# Altium PCB PCB1.PcbDoc
Units mm, origin at the board's own origin, x right, y up, seen from the top; angles counter-clockwise.
Board outline 101.09 x 92.71 mm, 2 copper layers (Top Layer, Bottom Layer); 37 components, 73 nets, 273 pads, 57 vias.
Unrouted connection lines stored in the file: 30.
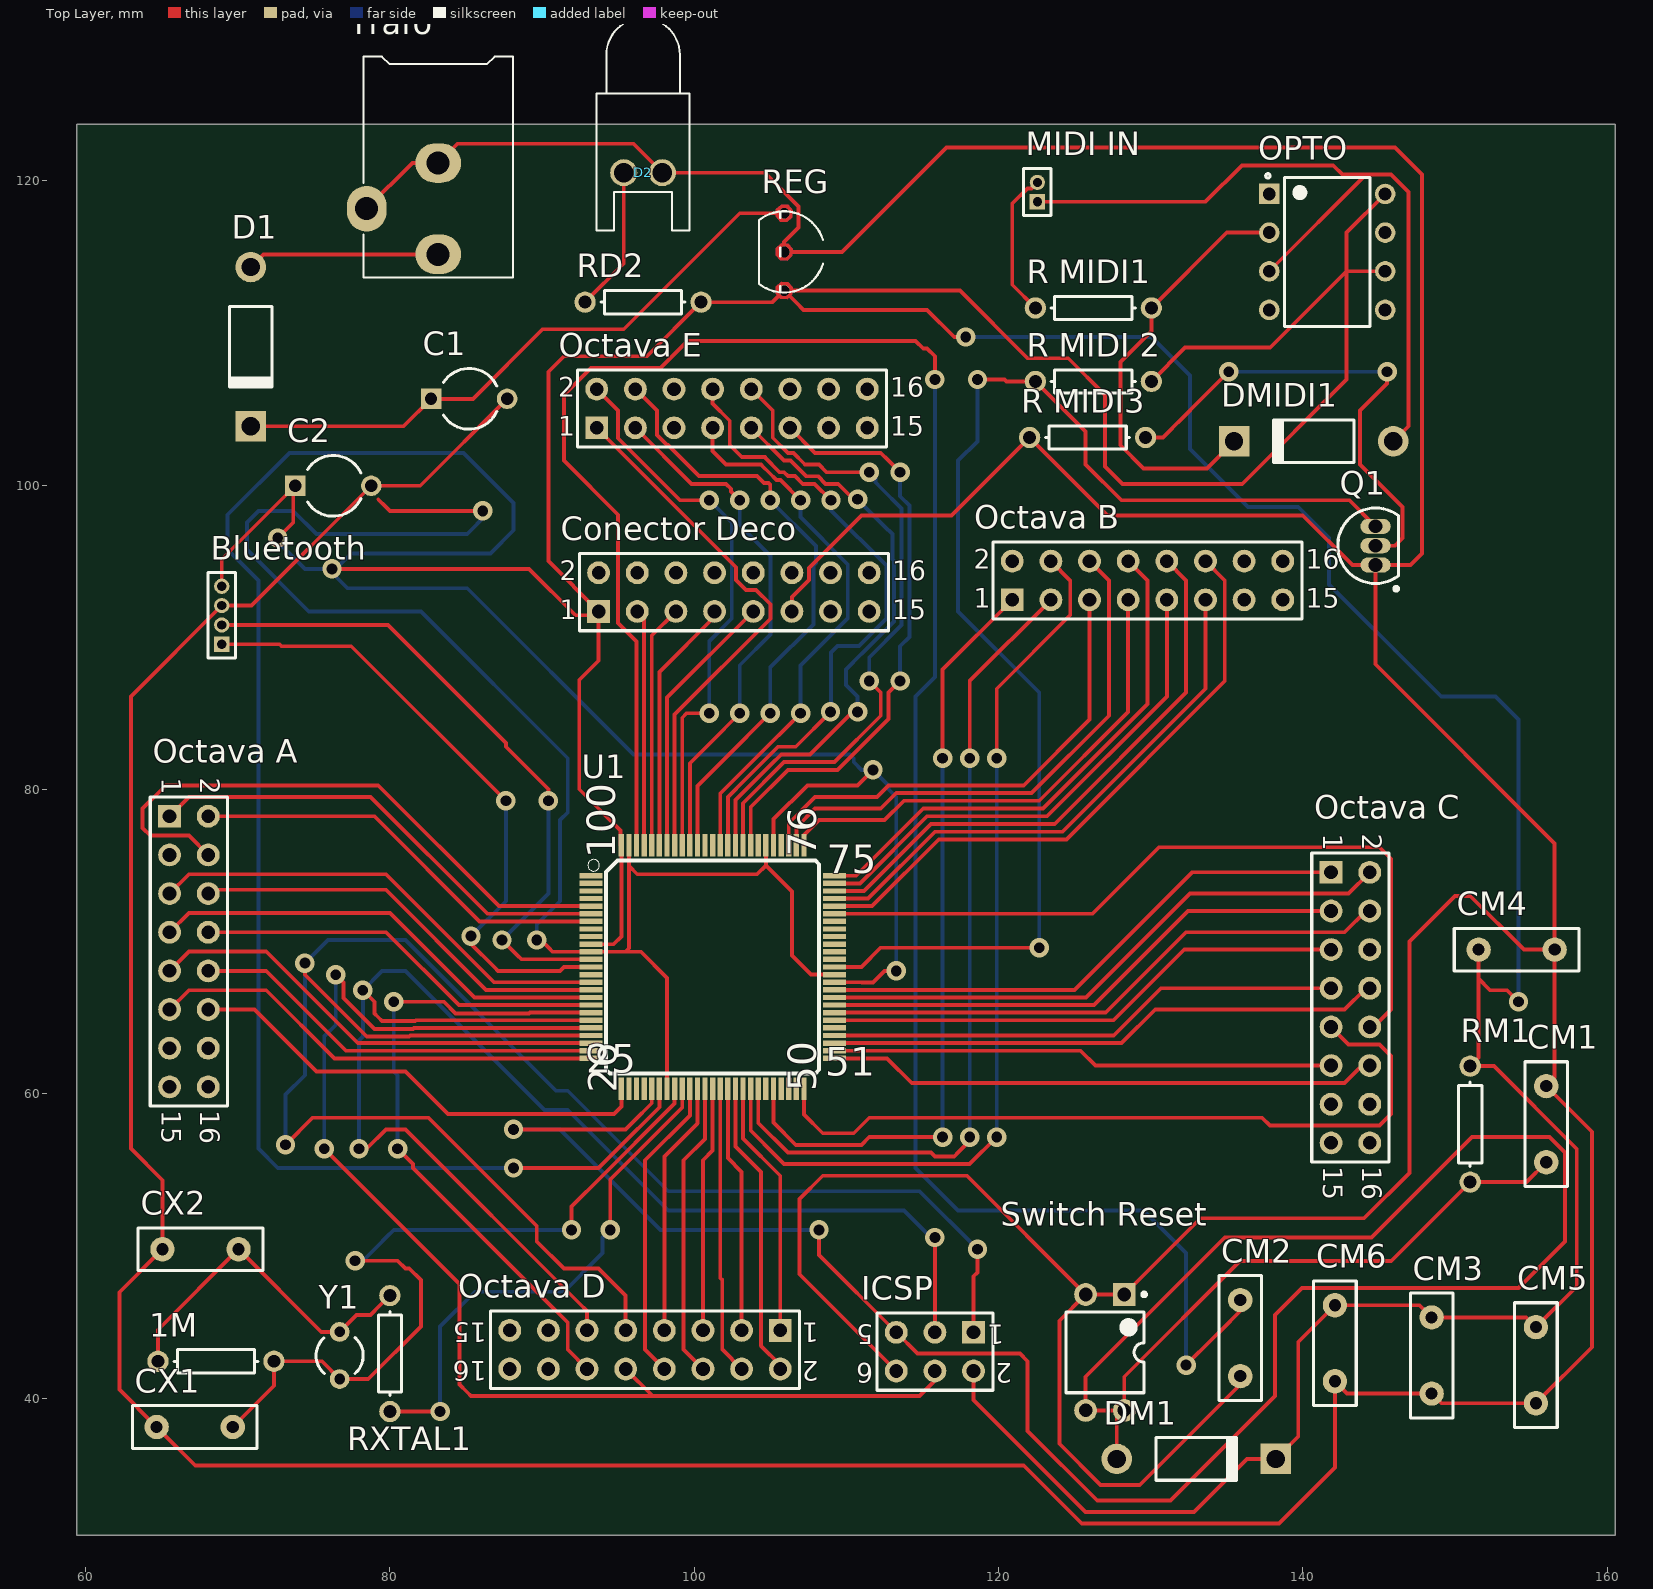
[diagram p0: Top Layer view]
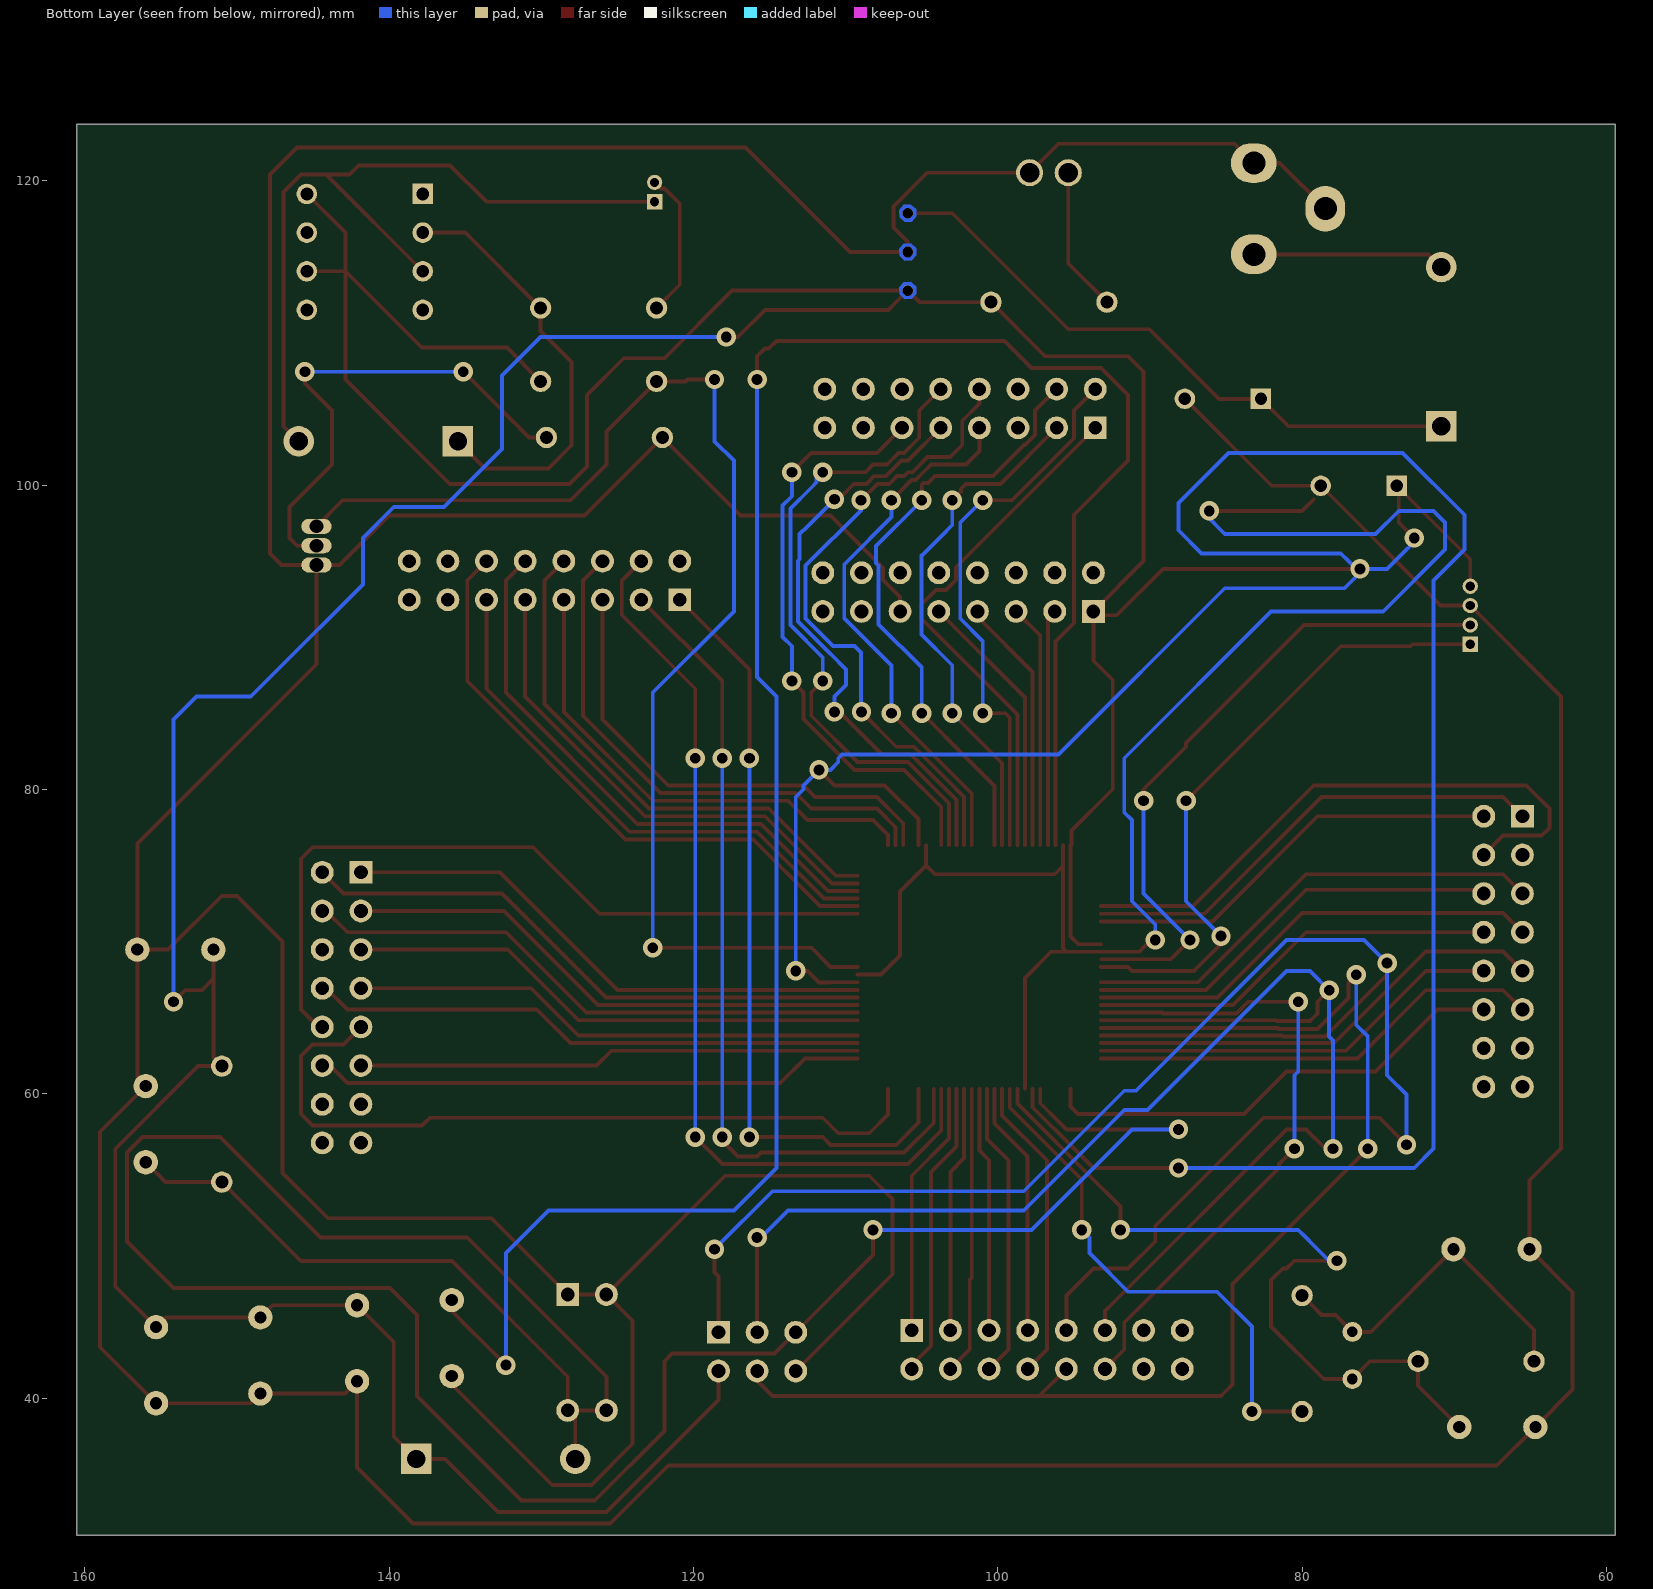
[diagram p1: Bottom Layer view, seen from below]

## Layer stack, top to bottom
Top Solder: solder mask 0.0102, Solder Resist, Dk 3.5
Top Layer: signal copper 0.0356
Dielectric 1: dielectric 0.32, FR-4, Dk 4.8
Bottom Layer: signal copper 0.0356
Bottom Solder: solder mask 0.0102, Solder Resist, Dk 3.5

## Board outline
59.436,30.988 160.528,30.988 160.528,123.698 59.436,123.698

## Design rules (kind name [scope] priority, off if disabled: settings)
Clearance [All] p1: gap=0.1
PolygonConnect [All] p1: connectstyle=Relief reliefconductorwidth=0.254 reliefentries=4 polygonreliefangle="90 Angle" airgapwidth=0.254
RoutingVias [All] p1: holewidth=0.711 width=1.27 viastyle="Through Hole" minholewidth=0.711 minwidth=1.27 maxholewidth=0.711 maxwidth=1.27
SMDNeckDown [All] p1 off: percent=0.000
ShortCircuit [OnLayer('Bottom Layer') vs OnLayer('Top Layer')] p1: allowed=FALSE
SolderMaskExpansion [All] p1: expansion=0.102
Width [All] p1: maxlimit=0.254 minlimit=0.254 preferedwidth=0.254
29 further rules are at their usual default settings.

## Components (designator, comment, footprint, x,y, rotation, side; value= is the part's Value field where it differs from the comment)
1M "Res1" AXIAL-0.3 68.58,42.418 r0 top (schematic designator RXTAL)
Bluetooth "HC-06" MHDR1X4 68.961,89.535 r90 top
C1 "Cap2" CAPR5-4X5 85.217,105.664 r0 top
C2 "Cap2" CAPR5-4X5 76.287,99.949 r0 top
CM1 "" "C Disc 8x2.5-5.0" 156,58 r90 top
CM2 "" "C Disc 8x2.5-5.0" 135.89,43.942 r90 top
CM3 "" "C Disc 8x2.5-5.0" 148.463,42.799 r90 top
CM4 "" "C Disc 8x2.5-5.0" 154.051,69.469 r180 top
CM5 "" "C Disc 8x2.5-5.0" 155.321,42.164 r90 top
CM6 "" "C Disc 8x2.5-5.0" 142.113,43.601 r270 top
"Conector Deco" "Header 8X2" HDR2X8 93.726,91.694 r0 top
CX1 "" "C Disc 8x2.5-5.0" 67.183,38.1 r0 top
CX2 "" "C Disc 8x2.5-5.0" 67.564,49.784 r0 top
D1 "Diode 1N4001" DO-41 70.866,109.093 r270 top
D2 "LED_ON" LED-0 96.647,120.523 r180 top
DM1 "Diode 1N4001" DO-41 133,36 r0 top
DMIDI1 "Diode 1N4148" DO-41 140.716,102.87 r180 top
ICSP "Header 3X2" HDR2X3 118.364,44.323 r180 top
"MIDI IN" "MHDR1X2" MHDR1X2 122.555,118.618 r90 top
"Octava A" "Header 8X2" HDR2X8 65.532,78.232 r270 top
"Octava B" "Header 8X2" HDR2X8 120.904,92.456 r0 top
"Octava C" "Header 8X2" HDR2X8 141.859,74.549 r270 top
"Octava D" "Header 8X2" HDR2X8 105.664,44.45 r180 top
"Octava E" "Header 8X2" HDR2X8 93.599,103.759 r0 top
OPTO "6N136" DIP762W50P254L977H451Q8 141.605,115.316 r0 top
Q1 "BC547" TO-92A 144.78,96.012 r0 top
"R MIDI1" "Res1" AXIAL-0.3 126.238,111.633 r180 top
"R MIDI3" "Res1" AXIAL-0.3 125.857,103.124 r180 top
"R MIDI 2" "Res1" AXIAL-0.3 126.238,106.807 r180 top
RD2 "Res1" AXIAL-0.3 96.647,112.014 r0 top
REG "7805" TO92- 105.918,115.316 r270 top
RM1 "Res1" AXIAL-0.3 151,58 r90 top
RXTAL1 "Res1" AXIAL-0.3 80.01,42.926 r90 top (schematic designator RXTAL)
"Switch Reset" "SW DIP-2" DIP-4 127,43 r270 top
Trafo "*" CONN_PWR_JACK_2.1x5.5mm 83.185,128.858 r0 top
U1 "MCU-ATMEGA2560-16AU(TQFP100)" TQFP100-0.5-14X14MM 101.219,68.326 r0 top
Y1 "XTAL" R38 76.708,42.799 r0 top

## Footprints (in the part's own frame and the unit in brackets; to place one, negate y for a bottom-side part, rotate by r counter-clockwise, add the part's x,y. Pads: shape width x height; smd on the part's side, far side on the other; paste and mask are expansions set on the pad)
AXIAL-0.3 [mm] "Axial Device, Thru-Hole; 2 Leads; 0.3 in Pin Spacing"
  round 1.4 hole 0.85: 1(-3.81,0) 2(3.81,0)
  silkscreen extent -2.77,-0.76 2.77,0.76
"C Disc 8x2.5-5.0" [mm] "C Disc 5x2.5-5.0"
  round 1.6 hole 0.8: 1(-2.5,0) 2(2.5,0)
  silkscreen extent -4.1,-1.4 4.1,1.4, body extent -3.99,-1.29 3.99,1.29, height 8.05
CAPR5-4X5 [mm] "Capacitor; 2 Leads"
  rect 1.35x1.35 hole 0.8: 1(-2.5,0)
  round 1.35 hole 0.8: 2(2.5,0)
  silkscreen extent -1.69,-2 1.82,2
CONN_PWR_JACK_2.1x5.5mm [mm] "Power Connector, 2.1mm ID, 5.5mm OD"
  oval 3x2.6 hole 1.511: 1(0,-13.7) 2(0,-7.7)
  oval 2.6x3 hole 1.511: 3(-4.7,-10.7)
  silkscreen extent -4.9,-15.23 4.93,-0.7, body extent -4.9,-14.1 4.5,0, height 11
DIP762W50P254L977H451Q8 [mm]
  rect 1.35x1.35 hole 0.85: 1(-3.81,3.81)
  round 1.35 hole 0.85: 2(-3.81,1.27) 3(-3.81,-1.27) 4(-3.81,-3.81) 5(3.81,-3.81) 6(3.81,-1.27) 7(3.81,1.27) 8(3.81,3.81)
  silkscreen extent -4.04,-4.9 2.8,5.14
DIP-4 [mm] "DIP; 4 Leads; Row Spacing 7.62 mm; Pitch 2.54 mm"
  rect 1.5x1.5 hole 0.9: 1(-3.81,1.27)
  round 1.5 hole 0.9: 2(-3.81,-1.27) 3(3.81,-1.27) 4(3.81,1.27)
  silkscreen extent -3.93,-2.55 2.65,2.7, body extent -3.15,-2.5 3.15,2.5, height 5.6
DO-41 [mm] "Diode, Axial; Body 5.2 x 2.7 mm (LxDia. max), Lead Dia. 0.86 mm (max)"
  round 2 hole 1.2: 1(-5.23,0)
  rect 2x2 hole 1.2: 2(5.23,0)
  silkscreen extent -2.65,-1.4 2.75,1.4
HDR2X3 [mm] "Connector; Header; 3x2 Position"
  rect 1.5x1.5 hole 0.9: 1(0,0)
  round 1.5 hole 0.9: 2(0,2.54) 3(2.54,0) 4(2.54,2.54) 5(5.08,0) 6(5.08,2.54)
  silkscreen extent -1.27,-1.27 6.35,3.81
HDR2X8 [mm] "Connector; Header; 8x2 Position"
  rect 1.5x1.5 hole 0.9: 1(0,0)
  round 1.5 hole 0.9: 2(0,2.54) 3(2.54,0) 4(2.54,2.54) 5(5.08,0) 6(5.08,2.54) 7(7.62,0) 8(7.62,2.54) 9(10.16,0) 10(10.16,2.54) 11(12.7,0) 12(12.7,2.54) 13(15.24,0) 14(15.24,2.54) 15(17.78,0) 16(17.78,2.54)
  silkscreen extent -1.27,-1.27 19.05,3.81
LED-0 [mil] "LED; 2 Leads"
  round 70 hole 50: 1(50,0) 2(-50,0)
  silkscreen extent -120,-400 120,150
MHDR1X2 [mm] "Connector; Header; 2 Position"
  rect 1x1 hole 0.6: 1(0,0)
  round 1 hole 0.6: 2(1.27,0)
  silkscreen extent -0.9,-0.9 2.17,0.9
MHDR1X4 [mm] "Connector; Header; 4 Position"
  rect 1x1 hole 0.6: 1(0,0)
  round 1 hole 0.6: 2(1.27,0) 3(2.54,0) 4(3.81,0)
  silkscreen extent -0.9,-0.9 4.71,0.9
R38 [mm] "Crystal, Thru-Hole; 2 Leads; Body 3.1 x 8.2 mm (Dia.xH)"
  round 1.3 hole 0.7: 1(0,1.55) 2(0,-1.55)
  silkscreen extent -1.55,-1.19 1.55,1.17
TO92- [mm]
  round 0.7 hole 0.7: 1(-2.54,0) 2(0,0) 3(2.54,0)
  Top Layer region: 3.108,0.207 2.795,0.547 2.333,0.568 1.993,0.255 1.972,-0.207 2.285,-0.547 2.747,-0.568 3.087,-0.255
  Top Layer region: 0.568,0.207 0.255,0.547 -0.207,0.568 -0.547,0.255 -0.568,-0.207 -0.255,-0.547 0.207,-0.568 0.547,-0.255
  Top Layer region: -1.972,0.207 -2.285,0.547 -2.747,0.568 -3.087,0.255 -3.108,-0.207 -2.795,-0.547 -2.333,-0.568 -1.993,-0.255
  Bottom Layer region: 3.108,0.207 2.795,0.547 2.333,0.568 1.993,0.255 1.972,-0.207 2.285,-0.547 2.747,-0.568 3.087,-0.255
  Bottom Layer region: 0.568,0.207 0.255,0.547 -0.207,0.568 -0.547,0.255 -0.568,-0.207 -0.255,-0.547 0.207,-0.568 0.547,-0.255
  Bottom Layer region: -1.972,0.207 -2.285,0.547 -2.747,0.568 -3.087,0.255 -3.108,-0.207 -2.795,-0.547 -2.333,-0.568 -1.993,-0.255
  Multi-Layer region: 3.108,0.207 2.795,0.547 2.333,0.568 1.993,0.255 1.972,-0.207 2.285,-0.547 2.747,-0.568 3.087,-0.255
  Multi-Layer region: 0.568,0.207 0.255,0.547 -0.207,0.568 -0.547,0.255 -0.568,-0.207 -0.255,-0.547 0.207,-0.568 0.547,-0.255
  Multi-Layer region: -1.972,0.207 -2.285,0.547 -2.747,0.568 -3.087,0.255 -3.108,-0.207 -2.795,-0.547 -2.333,-0.568 -1.993,-0.255
  silkscreen extent -2.66,-1.65 2.66,2.55
TO-92A [mm] "TO, Flat Index; 3 In-Line, Axial Leads; Body Dia. 4.5mm; Leads 0.51 x 0.48 mm (max)"
  oval 2x1 hole 0.9: 1(0,-1.27) 2(0,0) 3(0,1.27)
  silkscreen extent -2.48,-2.95 1.5,2.48, body extent -2.48,-2.5 1.5,2.5, height 6.86
TQFP100-0.5-14X14MM [mm]
  rect 1.5x0.35 smd: 1(-8,6) 2(-8,5.5) 3(-8,5) 4(-8,4.5) 5(-8,4) 6(-8,3.5) 7(-8,3) 8(-8,2.5) 9(-8,2) 10(-8,1.5) 11(-8,1) 12(-8,0.5) 13(-8,0) 14(-8,-0.5) 15(-8,-1) 16(-8,-1.5) 17(-8,-2) 18(-8,-2.5) 19(-8,-3) 20(-8,-3.5) 21(-8,-4) 22(-8,-4.5) 23(-8,-5) 24(-8,-5.5) 25(-8,-6) 51(8,-6) 52(8,-5.5) 53(8,-5) 54(8,-4.5) 55(8,-4) 56(8,-3.5) 57(8,-3) 58(8,-2.5) 59(8,-2) 60(8,-1.5) 61(8,-1) 62(8,-0.5) 63(8,0) 64(8,0.5) 65(8,1) 66(8,1.5) 67(8,2) 68(8,2.5) 69(8,3) 70(8,3.5) 71(8,4) 72(8,4.5) 73(8,5) 74(8,5.5) 75(8,6)
  rect 0.35x1.5 smd: 26(-6,-8) 27(-5.5,-8) 28(-5,-8) 29(-4.5,-8) 30(-4,-8) 31(-3.5,-8) 32(-3,-8) 33(-2.5,-8) 34(-2,-8) 35(-1.5,-8) 36(-1,-8) 37(-0.5,-8) 38(0,-8) 39(0.5,-8) 40(1,-8) 41(1.5,-8) 42(2,-8) 43(2.5,-8) 44(3,-8) 45(3.5,-8) 46(4,-8) 47(4.5,-8) 48(5,-8) 49(5.5,-8) 50(6,-8) 76(6,8) 77(5.5,8) 78(5,8) 79(4.5,8) 80(4,8) 81(3.5,8) 82(3,8) 83(2.5,8) 84(2,8) 85(1.5,8) 86(1,8) 87(0.5,8) 88(0,8) 89(-0.5,8) 90(-1,8) 91(-1.5,8) 92(-2,8) 93(-2.5,8) 94(-3,8) 95(-3.5,8) 96(-4,8) 97(-4.5,8) 98(-5,8) 99(-5.5,8) 100(-6,8)
  silkscreen extent -8.2,-7 7,7.07

## Part data
1M "R MIDI1" "R MIDI3" "R MIDI 2" RD2 RM1 RXTAL1: "Resistor"
Bluetooth: library part MHDR1X4, "Header, 4-Pin"
C1 C2: "Capacitor"
CM1 CM2 CM3 CM4 CM5 CM6 CX1 CX2: library part C, "Capacitor, generic"
"Conector Deco" "Octava A" "Octava B" "Octava C" "Octava D" "Octava E": "Header, 8-Pin, Dual row"
D1 DM1: "1 Amp General Purpose Rectifier"
D2: library part LED0, "Typical INFRARED GaAs LED"
DMIDI1: library part "Diode 1N4001", "1 Amp General Purpose Rectifier"
ICSP: "Header, 3-Pin, Dual row"
"MIDI IN": "Header, 2-Pin"
OPTO: "6N136 Series Single Channel 15 V 5300 Vrms Transistor Optocoupler - DIP-8"
Q1: library part 2N3904, "NPN General Purpose Amplifier"
REG: "5V Positive IC TO-220 Voltage Reg IC TO-220 VOLTAGE REG 5V POSITIVE"
"Switch Reset": "DIP Switch, 2 Position, SPST"
Trafo: library part CONN_PWR_JACK_2.1x5.5mm, "Power Connector, THT, 2.1mm ID, 5.5mm OD"
U1: "ATmega Series 16 MHz 256 KB Flash 8 KB SRAM 8-Bit Microcontroller - TQFP-100"
Y1: "Crystal Oscillator"

## Via types
v1: diameter 1.27, hole 0.711, Top Layer to Bottom Layer, 57 vias

## Nets (pads, with @x,y where several pads share a name; then routed paths per layer and width w, separated by ;. In a path a pad name is that pad's centre, name@x,y a point inside that pad or via, vN(x,y) a via of type N, cw(c..) or ccw(c..) an arc to the next point about the centre after c; other vN are vias at no path point)
GND: "Conector Deco.11" "R MIDI3.2" "Switch Reset.1" "Switch Reset.2" Bluetooth.3 C1.2 C2.2 CM1.2 CM2.1 CM3.1 CM4.1 CM5.1 CM6.2 CX1.1 CX2.1 D2.2 ICSP.6 Q1.1 REG.2 Trafo.2 Trafo.3 U1.11 U1.32 U1.62 U1.81 U1.99 | length 563.3
  Top Layer w0.254: Trafo.3 81.485,121.158 Trafo.2 84.455,122.428 96.012,122.428 D2.2 104.648,120.523 106.863,118.308 106.863,116.911 105.918,115.967 REG.2 109.728,115.316 116.586,122.174 146.05,122.174 147.828,120.396 147.828,95.504 147.066,94.742 Q1.1 ; C1.2 82.002,99.949 C2.2 70.913,92.075 Bluetooth.3 62.992,86.106 62.992,56.388 65.064,54.316 CX2.1 62.23,46.95 62.23,40.553 CX1.1 67.223,35.56 121.666,35.56 125.476,31.75 138.43,31.75 142.113,35.433 CM6.2 142.915,40.299 CM3.1 149.098,39.664 CM5.1 159,43.343 159,57.5 CM1.2 156.551,61.051 CM4.1 ; 90.678,69.342 90.694,69.326 U1.11 95.488,69.326 ; U1.99 95.719,74.969 ; U1.32 98.219,67.611 96.504,69.326 95.488,69.326 ; U1.81 104.719,75.001 ; 106.426,91.694 106.426,92.64 107.553,93.767 107.553,94.553 111,98 116.923,98 122.047,103.124 127.171,98 140,98 143.258,94.742 Q1.1 ; U1.62 107.688,67.826 106.426,69.088 106.426,73.294 104.719,75.001 ; ICSP.6 106.934,48.133 106.934,53.086 108.458,54.61 117.93,54.61 125.73,46.81 ; CM2.1 135.89,40.894 129.286,34.29 126.71,34.29 124,37 124,45.08 125.73,46.81 ; 95.488,69.326 95.719,69.557 95.719,74.969 ; 95.719,74.969 96.266,74.422 104.14,74.422 104.719,75.001 ; 125.73,46.81 128.27,46.81 133.276,51.816 144.018,51.816 147,54.798 147,70 150,73 151,73 154.531,69.469 CM4.1 ; Q1.1 144.78,88.22 156.551,76.449 CM4.1
NetBluetooth_1: Bluetooth.1 U1.13 | length 10
  Top Layer w0.254: Bluetooth.1 72.771,89.535 ; 87.118,68.076 87.122,68.072 91.186,68.072 91.44,68.326 U1.13
NetBluetooth_2: Bluetooth.2 U1.12 | length 21.9
  Top Layer w0.254: Bluetooth.2 79.883,90.805 87.63,83.058
NetC1_1: C1.1 D1.2 REG.1 | length 40.8
  Top Layer w0.254: D1.2 80.916,103.863 C1.1 85.471,105.664 90.043,110.236 95.377,110.236 102.997,117.856 REG.1
NetCM1_1: "Switch Reset.3" "Switch Reset.4" CM1.1 DM1.1 ICSP.5 RM1.1 U1.30 | length 159.8
  Top Layer w0.254: 96.012,58.166 97.219,59.373 U1.30 ; 108.204,49.784 108.204,49.403 ICSP.5 114.681,42.926 121.412,42.926 121.92,42.418 121.92,37.846 126.492,33.274 131.318,33.274 138.176,40.132 138.176,45.466 139.954,47.244 154.178,47.244 157.226,50.292 157.226,56.134 156.21,57.15 151.13,57.15 144.526,50.546 134.874,50.546 125.73,41.402 125.73,39.19 128.27,39.19 ; DM1.1 127.77,38.69 128.27,39.19 ; CM1.1 154.69,54.19 RM1.1 145.81,49 135.868,49 128.27,41.402 128.27,39.19
NetCM2_2: CM2.2 U1.98 | length 58.7
  Top Layer w0.254: U1.98 96.219,89.709 94.996,90.932 94.996,98.044 91.44,101.6 91.44,105.918 93.218,107.696 97.79,107.696 99.568,109.474 114.554,109.474 ; 134.62,44.45 135.89,45.72 CM2.2
"NetConector Deco_3": "Conector Deco.3" U1.97 | length 15.6
  Top Layer w0.254: 96.266,91.694 96.719,91.241 U1.97
"NetConector Deco_5": "Conector Deco.5" U1.96 | length 16
  Top Layer w0.254: U1.96 97.219,90.107 98.806,91.694
"NetConector Deco_7": "Conector Deco.7" U1.95 | length 16.9
  Top Layer w0.254: U1.95 97.719,87.719 ; 97.723,87.719 97.723,87.723 101.346,91.346 101.346,91.694
"NetConector Deco_9": "Conector Deco.9" U1.94 | length 17.7
  Top Layer w0.254: U1.94 98.219,86.027 103.886,91.694
NetCX1_2: 1M.2 CX1.2 U1.33 Y1.2 | length 30.5
  Top Layer w0.254: CX1.2 72.39,40.807 1M.2 75.539,42.418 Y1.2 78.587,41.249 82.042,44.704 82.042,47.752 81.28,48.514 81.026,48.514 80.518,49.022 ; 93.472,54.102 98.719,59.349 U1.33
NetCX2_2: 1M.1 CX2.2 U1.34 Y1.1 | length 30.3
  Top Layer w0.254: 1M.1 64.77,44.49 CX2.2 75.499,44.349 Y1.1 77.825,45.466 78.74,45.466 78.994,45.72 ; 94.488,53.34 94.488,54.356 99.219,59.087 U1.34
NetD1_1: D1.1 Trafo.1 | length 12.7
  Top Layer w0.254: D1.1 71.701,115.158 Trafo.1
NetD2_1: D2.1 RD2.1 | length 9.6
  Top Layer w0.254: RD2.1 95.377,114.554 D2.1
NetDMIDI1_1: "MIDI IN.1" DMIDI1.1 OPTO.3 | length 51.9
  Top Layer w0.254: 122.555,118.618 133.618,118.618 136,121 142,121 142.604,120.396 144.145,120.396 ; OPTO.3 144.145,120.396 ; DMIDI1.1 146.939,103.863 146.939,119.253 145.796,120.396 144.145,120.396
NetDMIDI1_2: "R MIDI1.1" DMIDI1.2 OPTO.2 | length 28.5
  Top Layer w0.254: DMIDI1.2 133.708,101.092 129.54,101.092 128.016,102.616 128.016,108.077 130.048,110.109 130.048,111.633 135.001,116.586 OPTO.2
NetICSP_1: "Octava D.9" ICSP.1 U1.22 | length 16.6
  Top Layer w0.254: 81.352,63.826 U1.22 ; 95.504,44.45 95.504,46.235 ; ICSP.1 118.364,47.244
NetICSP_3: "Octava D.11" ICSP.3 U1.20 | length 16.9
  Top Layer w0.254: 81.732,64.826 U1.20 ; 92.964,44.45 92.964,45.72 ; ICSP.3 115.824,48.514
NetICSP_4: "Octava D.10" ICSP.4 | length 34.1
  Top Layer w0.254: 85.344,40.132 97.282,40.132 ; 95.504,41.91 97.282,40.132 ; ICSP.4 115.824,41.148 114.808,40.132 97.282,40.132
"NetMIDI IN_2": "MIDI IN.2" "R MIDI1.2" | length 9.7
  Top Layer w0.254: 122.428,111.633 120.904,113.157 120.904,118.5 121.899,119.495 122.162,119.495 122.555,119.888
"NetOctava A_1": "Octava A.1" U1.6 | length 31.4
  Top Layer w0.254: 65.532,78.232 66.802,79.502 78.74,79.502 86.416,71.826 U1.6
"NetOctava A_2": "Octava A.2" U1.7 | length 28
  Top Layer w0.254: 68.072,78.232 78.994,78.232 85.9,71.326 U1.7
"NetOctava A_4": "Octava A.4" U1.5 | length 39.7
  Top Layer w0.254: 68.072,75.692 66.802,76.962 64.262,76.962 63.754,77.47 63.754,78.74 65.278,80.264 79.248,80.264 87.186,72.326 U1.5
"NetOctava A_5": "Octava A.5" U1.15 | length 31.2
  Top Layer w0.254: 65.532,73.152 66.802,74.422 79.756,74.422 86.852,67.326 U1.15
"NetOctava A_6": "Octava A.6" U1.16 | length 28
  Top Layer w0.254: 68.072,73.152 68.326,73.406 79.756,73.406 86.336,66.826 U1.16
"NetOctava A_7": "Octava A.7" U1.17 | length 30.5
  Top Layer w0.254: 65.532,70.612 66.802,71.882 80.01,71.882 85.566,66.326 U1.17
"NetOctava A_8": "Octava A.8" U1.18 | length 27.1
  Top Layer w0.254: 68.072,70.612 79.756,70.612 84.542,65.826 U1.18
"NetOctava A_9": "Octava A.9" U1.23 | length 30.7
  Top Layer w0.254: 65.532,68.072 66.802,69.342 71.882,69.342 77.898,63.326 U1.23
"NetOctava A_10": "Octava A.10" U1.24 | length 27.3
  Top Layer w0.254: 68.072,68.072 71.882,68.072 77.128,62.826 U1.24
"NetOctava A_11": "Octava A.11" U1.25 | length 30.1
  Top Layer w0.254: 65.532,65.532 66.802,66.802 71.882,66.802 76.358,62.326 U1.25
"NetOctava A_12": "Octava A.12" U1.26 | length 31.4
  Top Layer w0.254: 68.072,65.532 71.12,65.532 75.184,61.468 81.026,61.468 83.82,58.674 94.742,58.674 95.219,59.151 U1.26
"NetOctava B_1": "Octava B.1" U1.46 | length 9.2
  Top Layer w0.254: 105.219,58.103 U1.46 ; 116.332,87.376 116.332,87.884 120.904,92.456
"NetOctava B_3": "Octava B.3" U1.44 | length 24.1
  Top Layer w0.254: U1.44 104.219,58.087 106.172,56.134 115.57,56.134 115.824,55.88 117.094,55.88 ; 118.11,86.614 118.11,87.122 123.444,92.456
"NetOctava B_4": "Octava B.4" U1.43 | length 18.3
  Top Layer w0.254: U1.43 103.719,57.571 105.41,55.88 ; 119.888,84.328 119.888,86.614 124.714,91.44 124.714,93.726 123.444,94.996
"NetOctava B_5": "Octava B.5" U1.78 | length 31.9
  Top Layer w0.254: U1.78 106.219,77.771 107.95,79.502 112.014,79.502 112.776,80.264 121.666,80.264 125.984,84.582 125.984,92.456
"NetOctava B_6": "Octava B.6" U1.77 | length 35.4
  Top Layer w0.254: U1.77 106.719,77.509 107.95,78.74 112.268,78.74 113.284,79.756 122.174,79.756 127.254,84.836 127.254,93.726 125.984,94.996
"NetOctava B_7": "Octava B.7" U1.76 | length 32.7
  Top Layer w0.254: U1.76 107.219,76.993 108.204,77.978 112.522,77.978 113.792,79.248 122.682,79.248 128.524,85.09 128.524,92.456
"NetOctava B_8": "Octava B.8" U1.75 | length 35.2
  Top Layer w0.254: U1.75 110.648,74.326 115.062,78.74 122.936,78.74 129.794,85.598 129.794,93.726 128.524,94.996
"NetOctava B_9": "Octava B.9" U1.74 | length 33.3
  Top Layer w0.254: U1.74 110.91,73.826 115.316,78.232 123.19,78.232 131.064,86.106 131.064,92.456
"NetOctava B_10": "Octava B.10" U1.73 | length 37.7
  Top Layer w0.254: U1.73 111.172,73.326 115.57,77.724 123.698,77.724 132.334,86.36 132.334,93.726 131.064,94.996
"NetOctava B_11": "Octava B.11" U1.72 | length 35.9
  Top Layer w0.254: U1.72 111.434,72.826 115.824,77.216 124.206,77.216 133.604,86.614 133.604,92.456
"NetOctava B_12": "Octava B.12" U1.71 | length 40.2
  Top Layer w0.254: U1.71 111.696,72.326 116.078,76.708 124.46,76.708 134.874,87.122 134.874,93.726 133.604,94.996
"NetOctava C_1": "Octava C.1" U1.60 | length 35.8
  Top Layer w0.254: U1.60 124.992,66.826 132.715,74.549 141.859,74.549
"NetOctava C_2": "Octava C.2" U1.59 | length 38.6
  Top Layer w0.254: U1.59 125.762,66.326 132.588,73.152 143.002,73.152 144.399,74.549
"NetOctava C_3": "Octava C.3" U1.58 | length 35.2
  Top Layer w0.254: U1.58 126.278,65.826 132.461,72.009 141.859,72.009
"NetOctava C_4": "Octava C.4" U1.57 | length 37.9
  Top Layer w0.254: U1.57 127.048,65.326 132.334,70.612 142.748,70.612 144.145,72.009 144.399,72.009
"NetOctava C_5": "Octava C.5" U1.56 | length 34.6
  Top Layer w0.254: U1.56 127.564,64.826 132.207,69.469 141.859,69.469
"NetOctava C_7": "Octava C.7" U1.54 | length 33.9
  Top Layer w0.254: U1.54 127.58,63.826 130.683,66.929 141.859,66.929
"NetOctava C_8": "Octava C.8" U1.53 | length 36.7
  Top Layer w0.254: U1.53 128.096,63.326 130.302,65.532 142.748,65.532 144.145,66.929 144.399,66.929
"NetOctava C_9": "Octava C.9" U1.50 | length 50.3
  Top Layer w0.254: U1.50 107.219,58.643 108.458,57.404 110.49,57.404 111.506,58.42 137.326,58.42 137.834,57.912 145.034,57.912 145.796,58.674 145.796,62.484 145.034,63.246 143.002,63.246 141.859,64.389
"NetOctava C_10": "Octava C.10" U1.70 | length 50.5
  Top Layer w0.254: U1.70 126.182,71.826 130.556,76.2 145.034,76.2 145.796,75.438 145.796,65.532 144.653,64.389 144.399,64.389
"NetOctava C_11": "Octava C.11" U1.52 | length 33
  Top Layer w0.254: U1.52 125.388,62.826 126.365,61.849 141.859,61.849
"NetOctava C_12": "Octava C.12" U1.51 | length 36.3
  Top Layer w0.254: U1.51 112.68,62.326 114.3,60.706 142.748,60.706 143.891,61.849 144.399,61.849
"NetOctava D_1": "Octava D.1" U1.42 | length 16.9
  Top Layer w0.254: U1.42 103.219,57.055 105.664,54.61 105.664,44.45
"NetOctava D_2": "Octava D.2" U1.41 | length 19.6
  Top Layer w0.254: U1.41 102.719,56.539 104.394,54.864 104.394,43.434 105.664,42.164 105.664,41.91
"NetOctava D_3": "Octava D.3" U1.40 | length 16.3
  Top Layer w0.254: U1.40 102.219,55.769 103.124,54.864 103.124,44.45
"NetOctava D_4": "Octava D.4" U1.39 | length 19
  Top Layer w0.254: U1.39 101.719,47.887 101.854,47.752 101.854,43.18 103.124,41.91
"NetOctava D_5": "Octava D.5" U1.38 | length 16.1
  Top Layer w0.254: 100.584,44.45 100.584,55.626 101.219,56.261 U1.38
"NetOctava D_6": "Octava D.6" U1.37 | length 19.5
  Top Layer w0.254: 100.584,41.91 99.314,43.18 99.314,55.626 100.719,57.031 U1.37
"NetOctava D_7": "Octava D.7" U1.36 | length 16.8
  Top Layer w0.254: 98.044,44.45 98.044,55.88 100.219,58.055 U1.36
"NetOctava D_8": "Octava D.8" U1.35 | length 20.2
  Top Layer w0.254: 98.044,41.91 96.774,43.18 96.774,55.626 99.719,58.571 U1.35
"NetOctava E_1": "Octava E.1" U1.93 | length 35.1
  Top Layer w0.254: 93.599,103.759 102.759,94.599 102.759,93.767 103.419,93.107 104.067,93.107 105.013,92.161 105.013,91.214 98.723,84.924 98.723,83.719 ; U1.93 98.719,83.719
"NetOctava E_2": "Octava E.2" U1.92 | length 17.4
  Top Layer w0.254: 93.599,106.299 95,104.898 95,103.071 99.035,99.035 ; U1.92 99.219,84.219
"NetOctava E_3": "Octava E.3" U1.91 | length 17.5
  Top Layer w0.254: 96.139,103.759 99.822,100.076 102.108,100.076 ; U1.91 99.719,81.719 103,85
"NetOctava E_4": "Octava E.4" U1.90 | length 15.2
  Top Layer w0.254: 96.139,106.299 97.552,104.886 97.552,103.292 98.212,102.632 98.282,102.632 100.33,100.584 104.14,100.584 ; U1.90 100.219,80.219
"NetOctava E_7": "Octava E.7" U1.87 | length 13.3
  Top Layer w0.254: 101.219,103.759 101.219,102.235 102.108,101.346 104.394,101.346 104.546,101.194 ; U1.87 101.719,79.719 105,83
"NetOctava E_8": "Octava E.8" U1.86 | length 9.8
  Top Layer w0.254: 101.219,106.299 101.219,105.353 102.346,104.226 102.346,102.632 103.128,101.85 104.648,101.85 ; U1.86 102.219,79.359
"NetOctava E_9": "Octava E.9" U1.85 | length 9.2
  Top Layer w0.254: U1.85 102.719,79.097 ; 103.759,103.759 105.918,101.6 106.328,101.6 107.348,100.58 108.133,100.58 108.637,100.076
"NetOctava E_10": "Octava E.10" U1.84 | length 22
  Top Layer w0.254: U1.84 103.219,79.089 105.918,81.788 109.22,81.788 112.268,84.836 112.268,86.106 ; 103.759,106.299 105.172,104.886 105.172,103.108 106.176,102.104 106.536,102.104 107.241,101.399
"NetOctava E_11": "Octava E.11" U1.83 | length 8.6
  Top Layer w0.254: U1.83 103.719,78.228 103.723,78.232 ; 106.299,103.759 107.95,102.108 112.268,102.108
NetQ1_2: "R MIDI3.1" Q1.2 | length 4.2
  Top Layer w0.254: 129.667,103.124 130.81,103.124 132.08,104.394 ; Q1.2 146.05,96.012 146.054,96.016
NetQ1_3: "R MIDI 2.2" Q1.3 U1.63 | length 30.9
  Top Layer w0.254: U1.63 110.49,68.326 ; 120.396,106.934 120.523,106.807 122.428,106.807 125.73,103.505 125.73,101.346 128.076,99 143.062,99 Q1.3
VCC: "Conector Deco.1" "R MIDI 2.1" Bluetooth.4 C2.1 CM3.2 CM4.2 CM5.2 CM6.1 DM1.2 ICSP.2 OPTO.6 OPTO.8 RD2.2 REG.3 RM1.2 U1.8 U1.10 U1.31 U1.61 U1.80 U1.100 | length 248.8
  Top Layer w0.254: Bluetooth.4 68.961,95.123 C2.1 73.787,99.454 C2.1@73.66,99.327 ; U1.10 94.718,69.826 95.219,70.327 U1.100 ; 94.996,56.388 97.719,59.111 U1.31 ; U1.100@95.167,76.326 95.167,77.299 92.456,80.01 92.456,87.185 93.726,88.456 93.726,91.694 90.424,94.996 90.424,107.442 91.44,108.458 96.901,108.458 RD2.2 105.156,112.014 REG.3 ; U1.80 105.219,78.041 107.442,80.264 110.49,80.264 ; 106.68,112.014 REG.3 ; U1.61 111.236,67.326 111.252,67.31 ; ICSP.2 118.364,39.878 125.73,32.512 132.842,32.512 136.33,36 DM1.2 139.7,37.47 139.7,43.688 CM6.1 147.661,46.101 CM3.2 154.686,45.299 CM5.2 158,47.343 158,56.376 152.566,61.81 RM1.2 151.551,62.361 151.551,67.564 ; 130.048,106.807 132.27,109.029 137.858,109.029 142.875,114.046 ; OPTO.6 142.875,114.046 ; OPTO.8 142.875,116.586 142.875,114.046 ; CM4.2 151.551,67.564 ; 153.416,66.802 152.313,66.802 151.551,67.564 ; REG.3 117.475,112.776 121.92,108.331 124.587,108.331 127,105.918 127,101.219 128.143,100.076 136.017,100.076 142.875,106.934 142.875,114.046
pads on no net: "Conector Deco.2" "Conector Deco.4" "Conector Deco.6" "Conector Deco.8" "Conector Deco.10" "Conector Deco.12" "Conector Deco.13" "Conector Deco.14" "Conector Deco.15" "Conector Deco.16" "Octava A.3" "Octava A.13" "Octava A.14" "Octava A.15" "Octava A.16" "Octava B.2" "Octava B.13" "Octava B.14" "Octava B.15" "Octava B.16" "Octava C.6" "Octava C.13" "Octava C.14" "Octava C.15" "Octava C.16" "Octava D.12" "Octava D.13" "Octava D.14" "Octava D.15" "Octava D.16" "Octava E.5" "Octava E.6" "Octava E.12" "Octava E.13" "Octava E.14" "Octava E.15" "Octava E.16" OPTO.1 OPTO.4 OPTO.5 OPTO.7 RXTAL1.1 RXTAL1.2 U1.1 U1.2 U1.3 U1.4 U1.9 U1.14 U1.19 U1.21 U1.27 U1.28 U1.29 U1.45 U1.47 U1.48 U1.49 U1.55 U1.64 U1.65 U1.66 U1.67 U1.68 U1.69 U1.79 U1.82 U1.88 U1.89
copper on no net: | length 1262
  Top Layer w0.254: v1(72.644,96.52) 73.66,97.536 73.66,98.973 73.66,99.327 ; 72.771,89.535 72.898,89.408 73.914,89.408 77.47,89.408 v1(87.63,79.248) ; v1(73.152,56.642) 74.93,58.42 82.55,58.42 89.662,51.308 89.662,50.292 91.44,48.514 93.726,48.514 95.504,46.736 95.504,46.235 ; v1(74.422,68.58) 74.422,67.818 78.486,63.754 80.518,63.754 81.28,63.754 81.352,63.826 ; v1(75.692,56.388) 84.582,47.498 84.582,40.894 85.09,40.386 85.344,40.132 ; v1(76.2,94.488) 89.154,94.488 92.202,91.44 93.218,91.44 ; v1(76.454,67.818) 76.962,67.31 76.962,66.294 78.994,64.262 80.264,64.262 81.534,64.262 81.598,64.326 93.219,64.326 ; v1(77.724,49.022) 79.502,49.022 80.01,49.022 ; v1(77.978,56.388) 78.486,56.388 79.756,57.658 81.026,57.658 92.456,46.228 92.964,45.72 92.964,45.466 ; v1(78.232,66.802) 78.994,66.04 78.994,65.786 78.994,65.278 79.248,65.024 79.502,64.77 81.676,64.77 81.732,64.826 ; 78.867,45.593 79.248,45.974 80.01,46.736 80.01,46.99 ; 79.248,99.06 79.756,98.552 80.01,98.298 v1(86.106,98.298) ; 80.01,39.116 81.534,39.116 ; 80.014,49.026 80.01,49.022 ; v1(80.264,66.04) 83.566,66.04 84.328,65.278 89.154,65.278 89.202,65.326 90.472,65.326 93.219,65.326 ; 80.518,49.022 80.01,49.022 ; v1(80.518,56.388) 81.534,55.372 81.534,55.118 81.788,54.864 90.17,46.482 91.694,44.958 91.694,43.18 92.964,41.91 ; 81.28,39.116 82.042,39.116 v1(83.312,39.116) ; v1(85.344,70.358) 85.344,69.85 86.868,68.326 87.118,68.076 ; v1(87.376,70.104) 88.392,69.088 88.646,68.834 92.234,68.834 93.211,68.834 ; 87.63,83.058 87.63,82.804 90.424,80.01 v1(90.424,79.248) ; v1(88.138,55.118) 93.726,55.118 94.996,56.388 ; v1(88.138,57.658) 95.504,57.658 96.012,58.166 ; v1(89.662,70.104) 89.916,70.104 90.424,69.596 90.694,69.326 ; v1(91.948,51.054) 91.948,52.324 91.948,52.578 93.98,54.61 ; v1(94.488,51.054) 94.488,52.324 94.488,53.34 ; 99.071,99 99.784,99 v1(101,99) ; 99.219,84.219 99.219,84.707 99.512,85 v1(101,85) ; 99.719,81.719 101,83 v1(103,85) ; 100.219,80.219 102,82 v1(105,85) ; 102.108,100.076 102.432,99.752 102.432,99.568 v1(103,99) ; 102.219,79.506 103.378,80.665 105.517,82.804 106.68,82.804 v1(108.966,85.09) ; 102.719,78.994 102.719,79.293 105.058,81.632 105.726,82.3 107.607,82.3 110.397,85.09 v1(110.744,85.09) ; 103.723,78.232 103.723,78.831 106.172,81.28 109.425,81.28 112.772,84.627 112.772,86.356 v1(113.538,87.122) ; 104.14,100.584 104.59,100.134 104.902,100.134 105,100.036 v1(105,99) ; 104.546,101.194 104.902,100.838 105.404,100.336 105.664,100.336 105.67,100.33 v1(107,99) ; 104.648,101.805 105.613,100.84 105.916,100.84 105.918,100.838 106.172,100.584 106.631,100.584 107.139,100.076 107.188,100.076 107.924,100.076 v1(109,99) ; 105,83 106,84 v1(107,85) ; 105.156,56.134 105.918,55.372 106.172,55.372 118.11,55.372 v1(119.888,57.15) ; 105.219,58.103 106.68,56.642 110.998,56.642 111.506,57.15 v1(116.332,57.15) ; 106.68,112.014 107.188,111.506 115.316,111.506 117.094,109.728 v1(117.856,109.728) ; 107.294,101.346 108.204,101.346 108.712,100.838 v1(111.506,100.838) ; 108.204,49.784 108.204,50.292 v1(108.204,51.054) ; 108.637,100.076 109.474,100.076 110.49,99.06 v1(110.744,99.06) ; 110.236,80.264 110.744,80.264 110.998,80.518 v1(111.76,81.28) ; 110.49,68.326 110.998,68.326 112.268,69.596 v1(122.682,69.596) ; 111.014,67.31 111.76,67.31 112.522,68.072 v1(113.284,68.072) ; v1(111.506,87.122) 112.014,86.614 112.268,86.36 112.268,86.106 ; 112.268,102.108 112.776,101.6 v1(113.538,100.838) ; 114.554,109.474 115.062,108.966 115.316,108.966 115.824,108.458 v1(115.824,106.934) ; 115.824,48.26 115.824,49.276 v1(115.824,50.546) ; v1(116.332,82.042) 116.332,85.09 ; 116.332,84.582 116.332,87.63 ; 117.094,55.88 117.348,56.134 118.11,56.896 v1(118.11,57.15) ; v1(118.11,82.042) 118.11,84.836 ; 118.11,84.328 118.11,87.122 ; 118.364,46.736 118.364,48.006 118.618,48.26 v1(118.618,49.784) ; v1(118.618,106.934) 119.888,106.934 120.396,106.934 ; v1(119.888,82.042) 119.888,83.566 ; 119.888,83.312 119.888,85.344 ; 131.826,104.14 132.588,104.902 ; v1(132.334,42.164) 134.112,43.942 134.62,44.45 ; 132.334,104.648 v1(135.128,107.442) ; v1@145.542,107.188 145.542,106.68 143.764,104.902 143.764,101.346 146.558,98.552 146.558,96.52 146.304,96.266 ; 146.05,96.012 146.431,96.393 ; 153.416,66.802 v1(154.178,66.04) v1@153.924,66.04
  Bottom Layer w0.254: v1@72.644,96.266 73.406,95.504 74.422,94.488 v1(76.2,94.488) ; v1(73.152,56.642) 73.152,58.674 73.152,59.944 74.422,61.214 v1(74.422,68.58) 75.946,70.104 81.026,70.104 90.932,60.198 91.694,60.198 98.298,53.594 114.808,53.594 v1(118.618,49.784) ; v1(75.692,56.388) 75.692,63.754 76.454,64.516 76.454,66.548 v1(76.454,67.818) ; v1(77.724,49.022) 78.232,49.022 79.248,50.038 79.756,50.546 80.264,51.054 v1(91.948,51.054) ; v1(77.978,56.388) 77.978,63.5 78.232,63.754 78.232,65.024 v1(78.232,66.802) 79.502,68.072 81.026,68.072 90.17,58.928 91.694,58.928 98.298,52.324 113.792,52.324 v1@115.57,50.546 ; v1(80.264,66.04) 80.264,62.992 80.264,61.468 80.518,61.214 v1(80.518,56.388) ; v1(83.312,39.116) 83.312,42.164 ; 83.312,41.656 83.312,44.704 85.598,46.99 91.44,46.99 93.726,49.276 ; 84.582,96.774 85.09,96.774 85.344,97.028 86.106,97.79 v1(86.106,98.298) ; 84.836,96.774 75.184,96.774 73.66,98.298 71.374,98.298 70.612,97.536 70.612,95.758 74.676,91.694 82.042,91.694 91.694,82.042 91.694,78.486 91.186,77.978 91.186,77.724 91.186,72.644 89.662,71.12 v1(89.662,70.104) ; v1(85.344,70.358) 87.63,72.644 87.63,75.438 87.63,76.962 v1(87.63,79.248) ; v1(87.376,70.104) 90.424,73.152 ; v1(88.138,55.118) 72.644,55.118 71.374,56.388 71.374,84.582 71.374,93.726 69.342,95.758 69.342,98.044 73.406,102.108 84.836,102.108 88.138,98.806 88.138,97.028 86.614,95.504 77.47,95.504 76.962,94.996 76.454,94.488 v1(76.2,94.488) ; v1(88.138,57.658) 90.17,57.658 91.186,57.658 97.79,51.054 v1(108.204,51.054) ; 90.424,73.406 90.424,73.152 ; v1(90.424,79.248) 90.424,74.422 90.424,73.152 ; 93.472,49.022 93.98,49.53 93.98,50.546 v1(94.488,51.054) ; v1(101,85) 101,89.754 102.473,91.227 102.473,91.714 102.473,97.527 v1(101,99) ; v1@102.616,84.582 103,84.966 103,88.157 105.013,90.17 105.013,91.227 105.013,95.357 105,95.37 103.716,96.654 103,97.37 v1(103,99) ; v1(105,85) 105,88 107.839,90.839 107.839,94.701 108,94.862 108,96 v1(105,99) ; v1(107,85) 107,88 107,88.134 110.093,91.227 110.093,94.794 110,94.887 107,97.887 v1(107,99) ; v1@108.882,85.005 109,85.124 109,89 109.421,89.421 110.827,89.421 112.633,91.227 112.633,94.701 109,98.334 v1(109,99) ; v1(110.744,85.09) 110.744,86.106 109.982,86.868 109.982,87.884 111.015,88.917 111.036,88.917 113.137,91.018 113.137,95.017 113.03,95.124 113.03,96.266 ; v1(110.744,99.06) 112.522,97.282 113.03,96.774 113.03,96.012 ; v1(111.506,87.122) 111.506,88.675 113.641,90.81 113.641,98.449 112.268,99.822 111.912,100.178 111.912,100.432 v1(111.506,100.838) ; v1(113.284,68.072) 113.284,79.502 112.776,80.01 112.776,80.264 v1(111.76,81.28) 110.998,81.28 110.49,81.788 110.49,82.042 110.236,82.296 96.012,82.296 85.09,93.218 77.216,93.218 76.2,94.234 v1(76.2,94.488) ; v1(113.538,87.122) 113.538,88.646 113.538,89.408 114.145,90.015 114.145,98.658 113.538,99.265 v1(113.538,100.838) ; v1(115.824,106.934) 115.824,87.376 114.554,86.106 114.554,55.118 117.348,52.324 129.54,52.324 132.334,49.53 132.334,44.196 ; v1(116.332,57.15) 116.332,73.406 ; 116.332,73.152 116.332,74.93 ; 116.332,74.676 v1(116.332,82.042) ; v1(117.856,109.728) 130.048,109.728 132.588,107.188 132.588,102.362 136.398,98.552 139.7,98.552 141.732,96.52 141.732,93.472 147.574,87.63 ; v1(118.11,57.15) 118.11,73.406 ; 118.11,72.644 118.11,75.692 ; 118.11,74.676 v1(118.11,82.042) ; v1(118.618,106.934) 118.618,102.87 117.348,101.6 117.348,91.694 122.682,86.36 122.682,73.152 ; v1(119.888,57.15) 119.888,72.898 ; 119.888,72.39 119.888,75.438 ; 119.888,74.422 v1(119.888,82.042) ; v1(122.682,69.596) 122.682,72.136 122.682,74.422 ; v1(132.334,42.164) 132.334,43.434 ; 132.334,43.18 132.334,44.45 ; v1(135.128,107.442) 143.764,107.442 ; 143.51,107.442 144.272,107.442 v1(145.542,107.442) ; 147.32,87.884 149.098,86.106 152.654,86.106 154.178,84.582 154.178,82.55 ; v1(154.178,66.04) 154.178,83.312

## Text inside footprints (layer, text, board x,y; h text height)
"Conector Deco": Top Overlay "16" at 113.03,93.726 h1.27; Top Overlay "15" at 113.03,91.186 h1.27; Top Overlay "1" at 91.186,91.186 h1.27; Top Overlay "2" at 91.186,93.726 h1.27
ICSP: Top Overlay "1" at 120.396,44.831 h1.27 r180; Top Overlay "2" at 120.904,42.291 h1.27 r180; Top Overlay "5" at 111.76,44.831 h1.27 r180; Top Overlay "6" at 111.76,42.291 h1.27 r180
"Octava A": Top Overlay "16" at 67.564,58.928 h1.27 r270; Top Overlay "15" at 65.024,58.928 h1.27 r270; Top Overlay "1" at 65.024,80.772 h1.27 r270; Top Overlay "2" at 67.564,80.772 h1.27 r270
"Octava B": Top Overlay "16" at 140.208,94.488 h1.27; Top Overlay "15" at 140.208,91.948 h1.27; Top Overlay "1" at 118.364,91.948 h1.27; Top Overlay "2" at 118.364,94.488 h1.27
"Octava C": Top Overlay "16" at 143.891,55.245 h1.27 r270; Top Overlay "15" at 141.351,55.245 h1.27 r270; Top Overlay "1" at 141.351,77.089 h1.27 r270; Top Overlay "2" at 143.891,77.089 h1.27 r270
"Octava D": Top Overlay "16" at 86.36,42.418 h1.27 r180; Top Overlay "15" at 86.36,44.958 h1.27 r180; Top Overlay "1" at 108.204,44.958 h1.27 r180; Top Overlay "2" at 108.204,42.418 h1.27 r180
"Octava E": Top Overlay "16" at 112.903,105.791 h1.27; Top Overlay "15" at 112.903,103.251 h1.27; Top Overlay "1" at 91.059,103.251 h1.27; Top Overlay "2" at 91.059,105.791 h1.27
U1: Top Overlay "100" at 94.819,75.476 h1.88 r90; Top Overlay "76" at 108.019,75.576 h1.88 r90; Top Overlay "75" at 108.719,74.476 h1.88; Top Overlay "51" at 108.619,61.176 h1.88; Top Overlay "50" at 108.019,60.176 h1.88 r90; Top Overlay "26" at 94.919,60.076 h1.88 r90; Top Overlay "25" at 92.919,61.376 h1.88; Mechanical 1 "R" at 104.609,67.006 h1.88; Mechanical 1 "TQFP 100" at 98.409,65.596 h1.88